# Altium PCB blePGN.PcbDoc
Units mm, origin at the board's own origin, x right, y up, seen from the top; angles counter-clockwise.
Board outline 79.88 x 74.8 mm, 4 copper layers (Top Layer, Internal Plane 1, Internal Plane 2, Bottom Layer), stack 0.462 mm thick; 66 components, 72 nets, 329 pads, 104 vias.
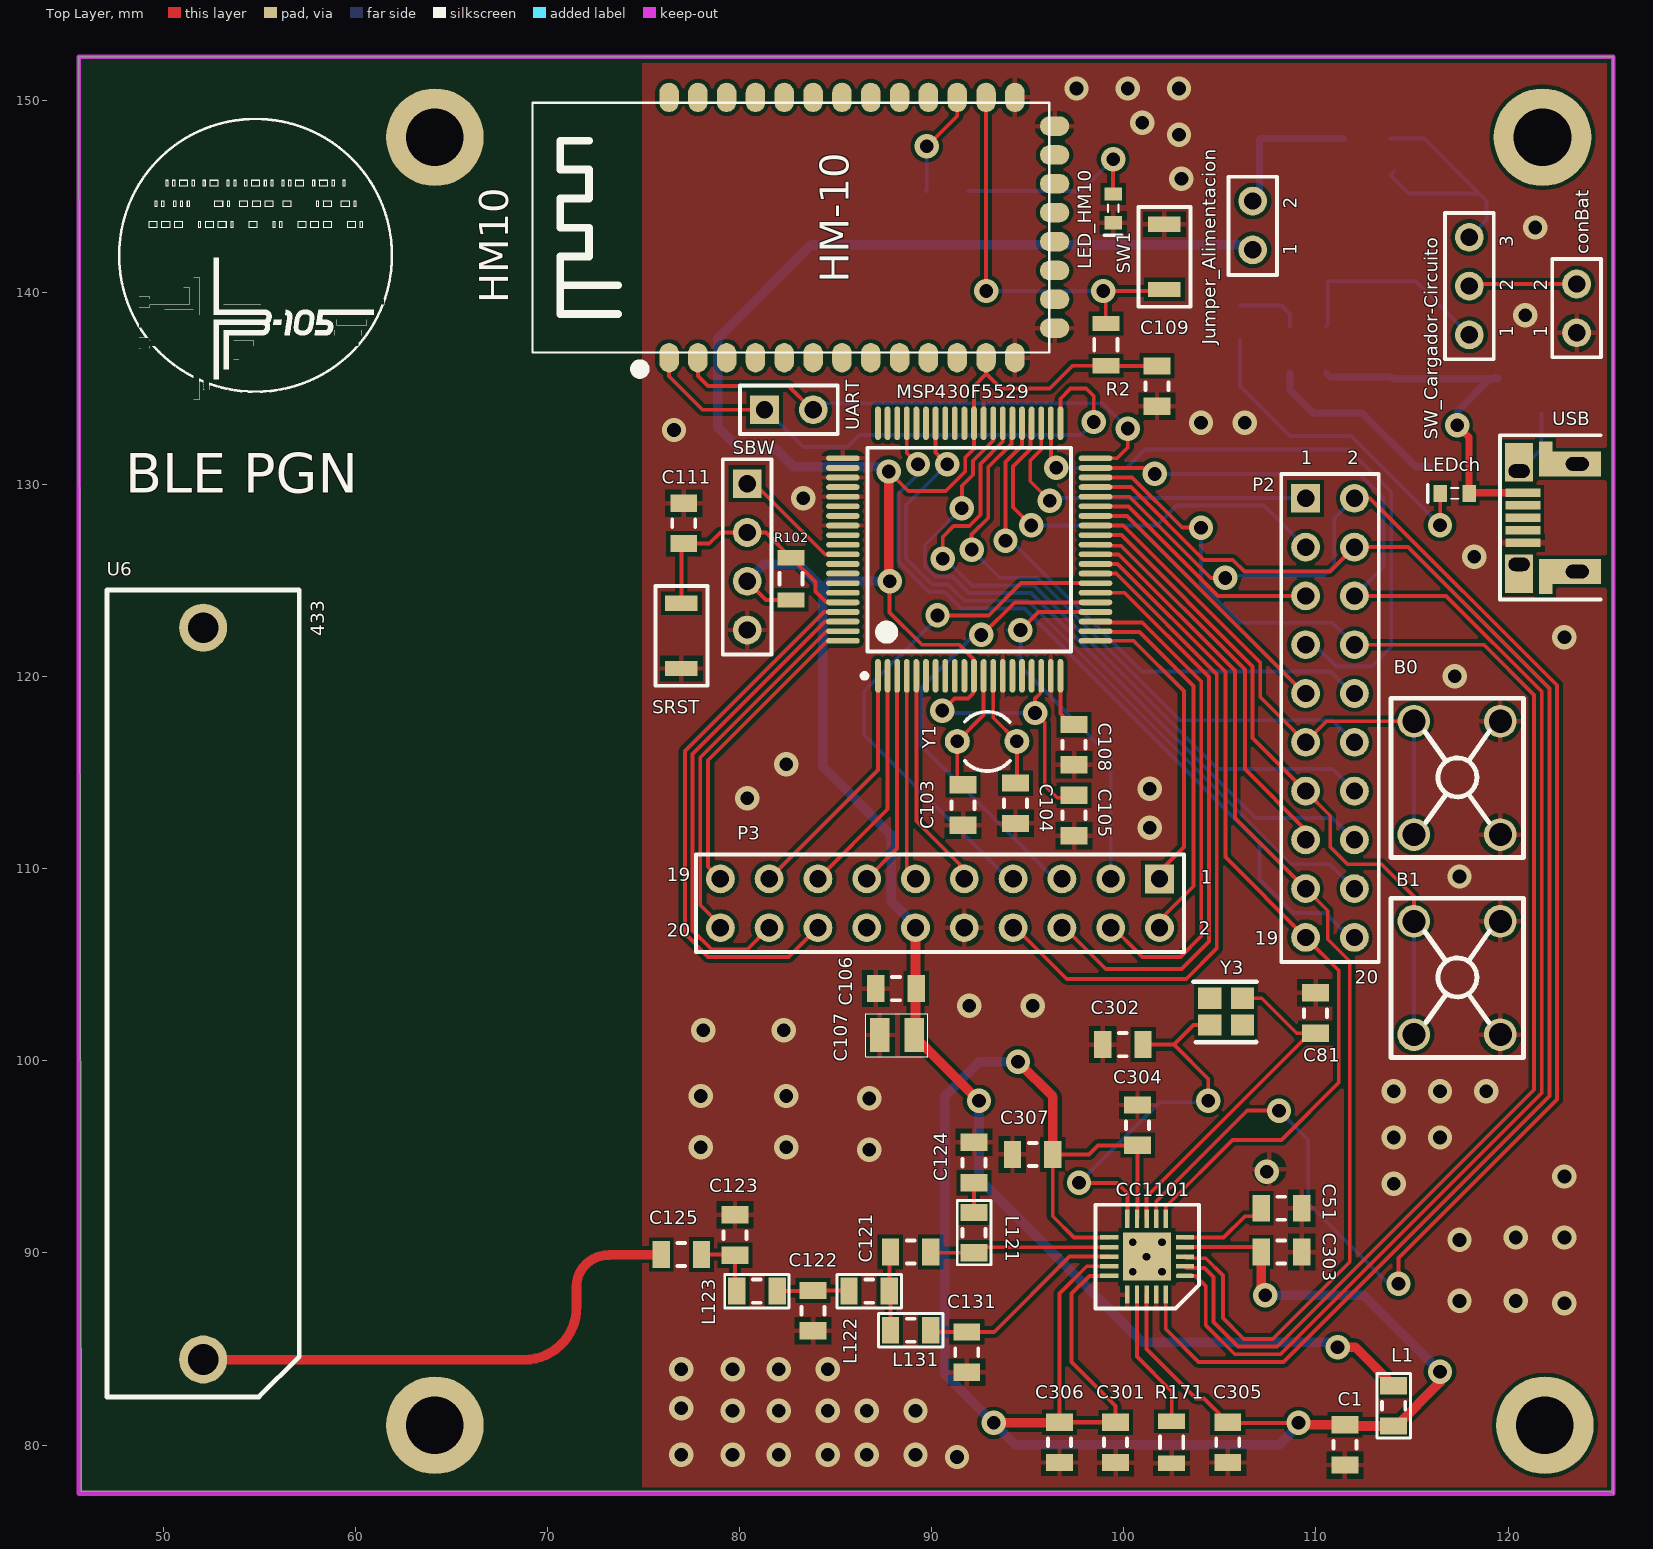
[diagram p0: Top Layer view]
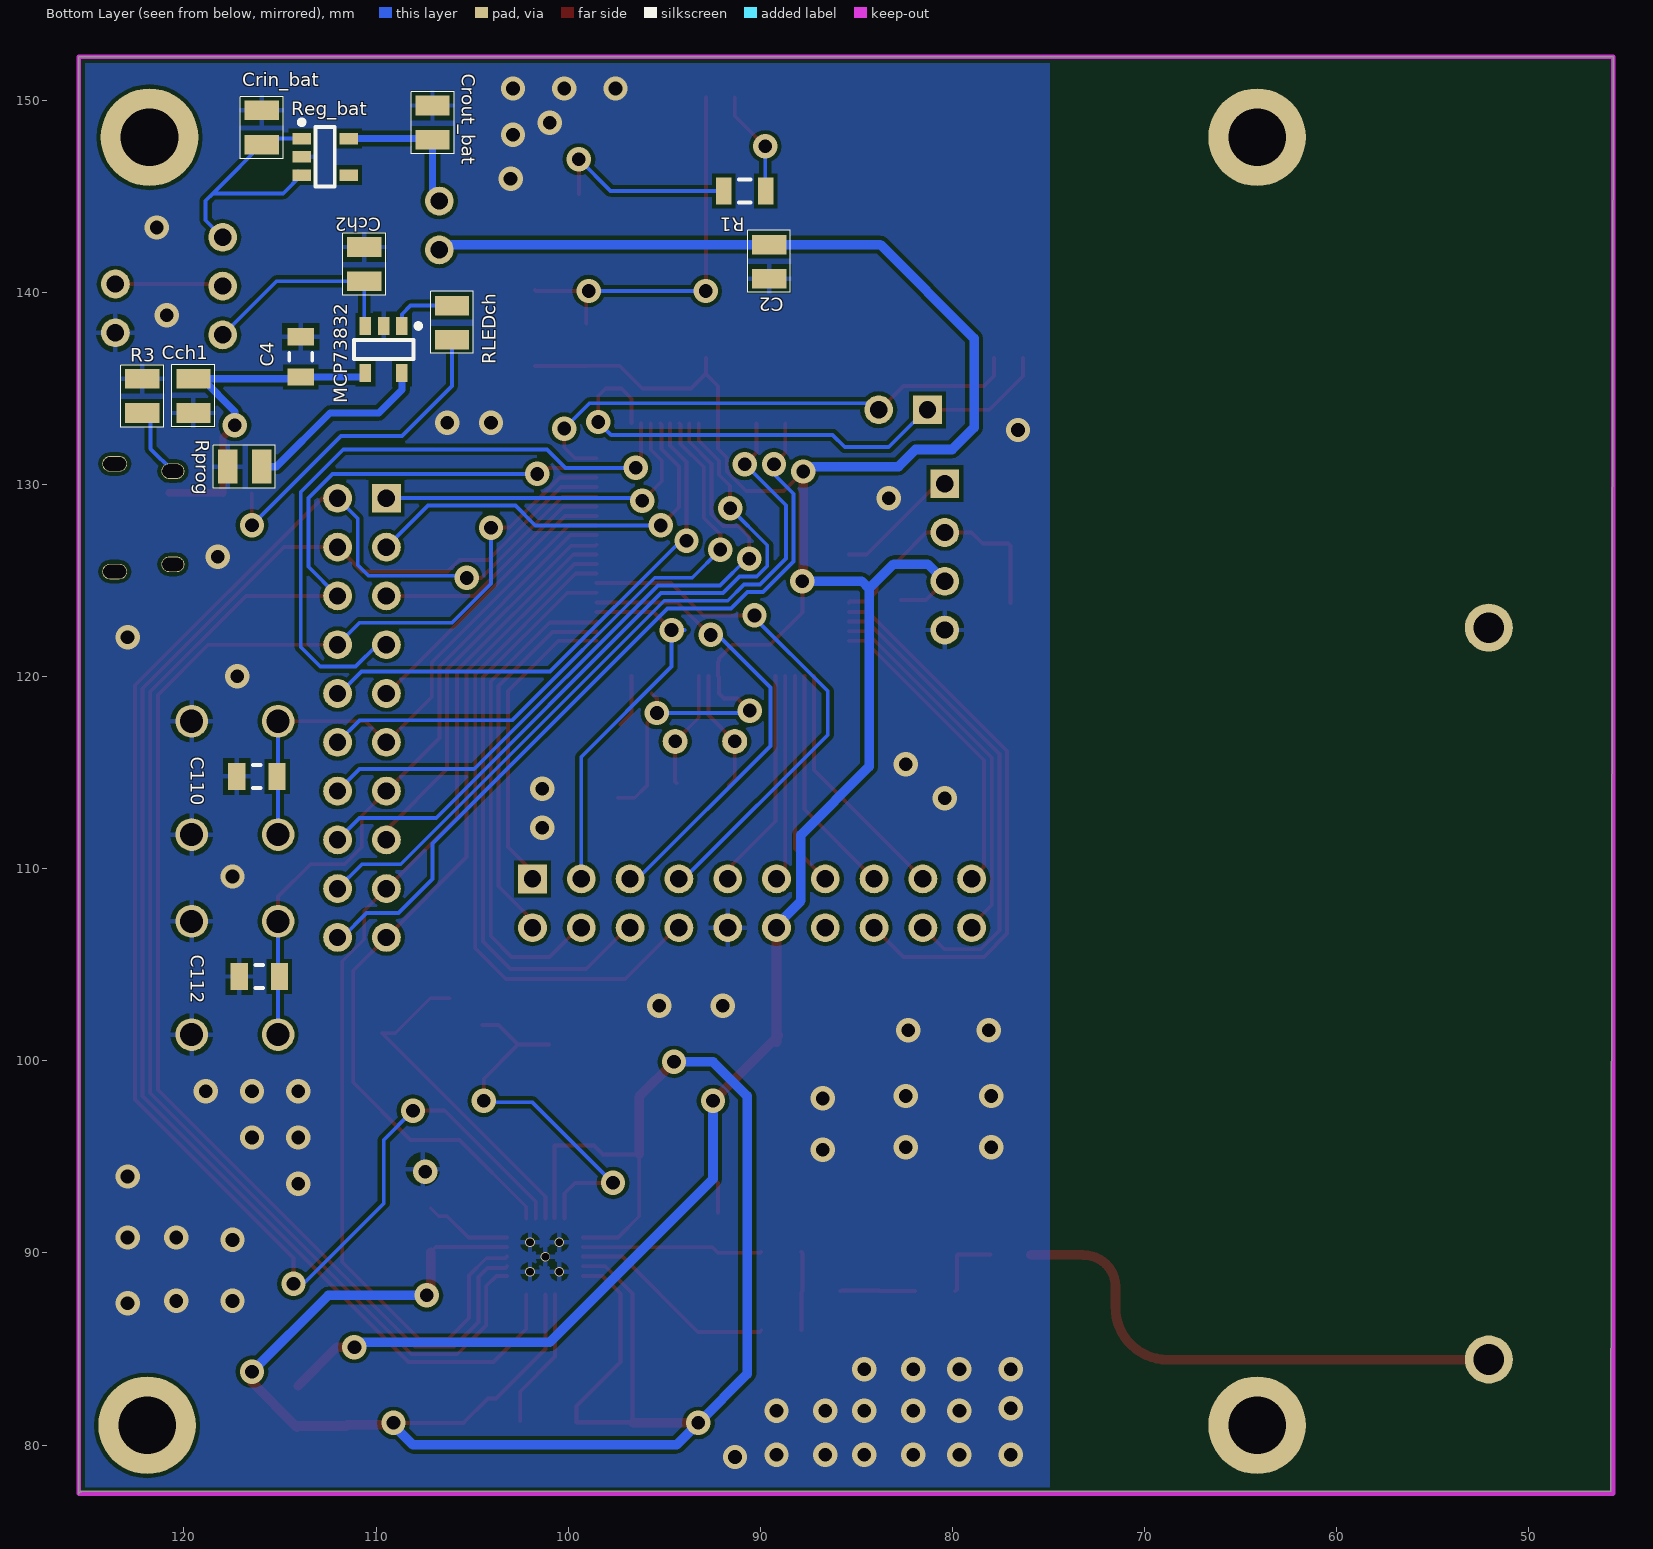
[diagram p1: Bottom Layer view, seen from below]
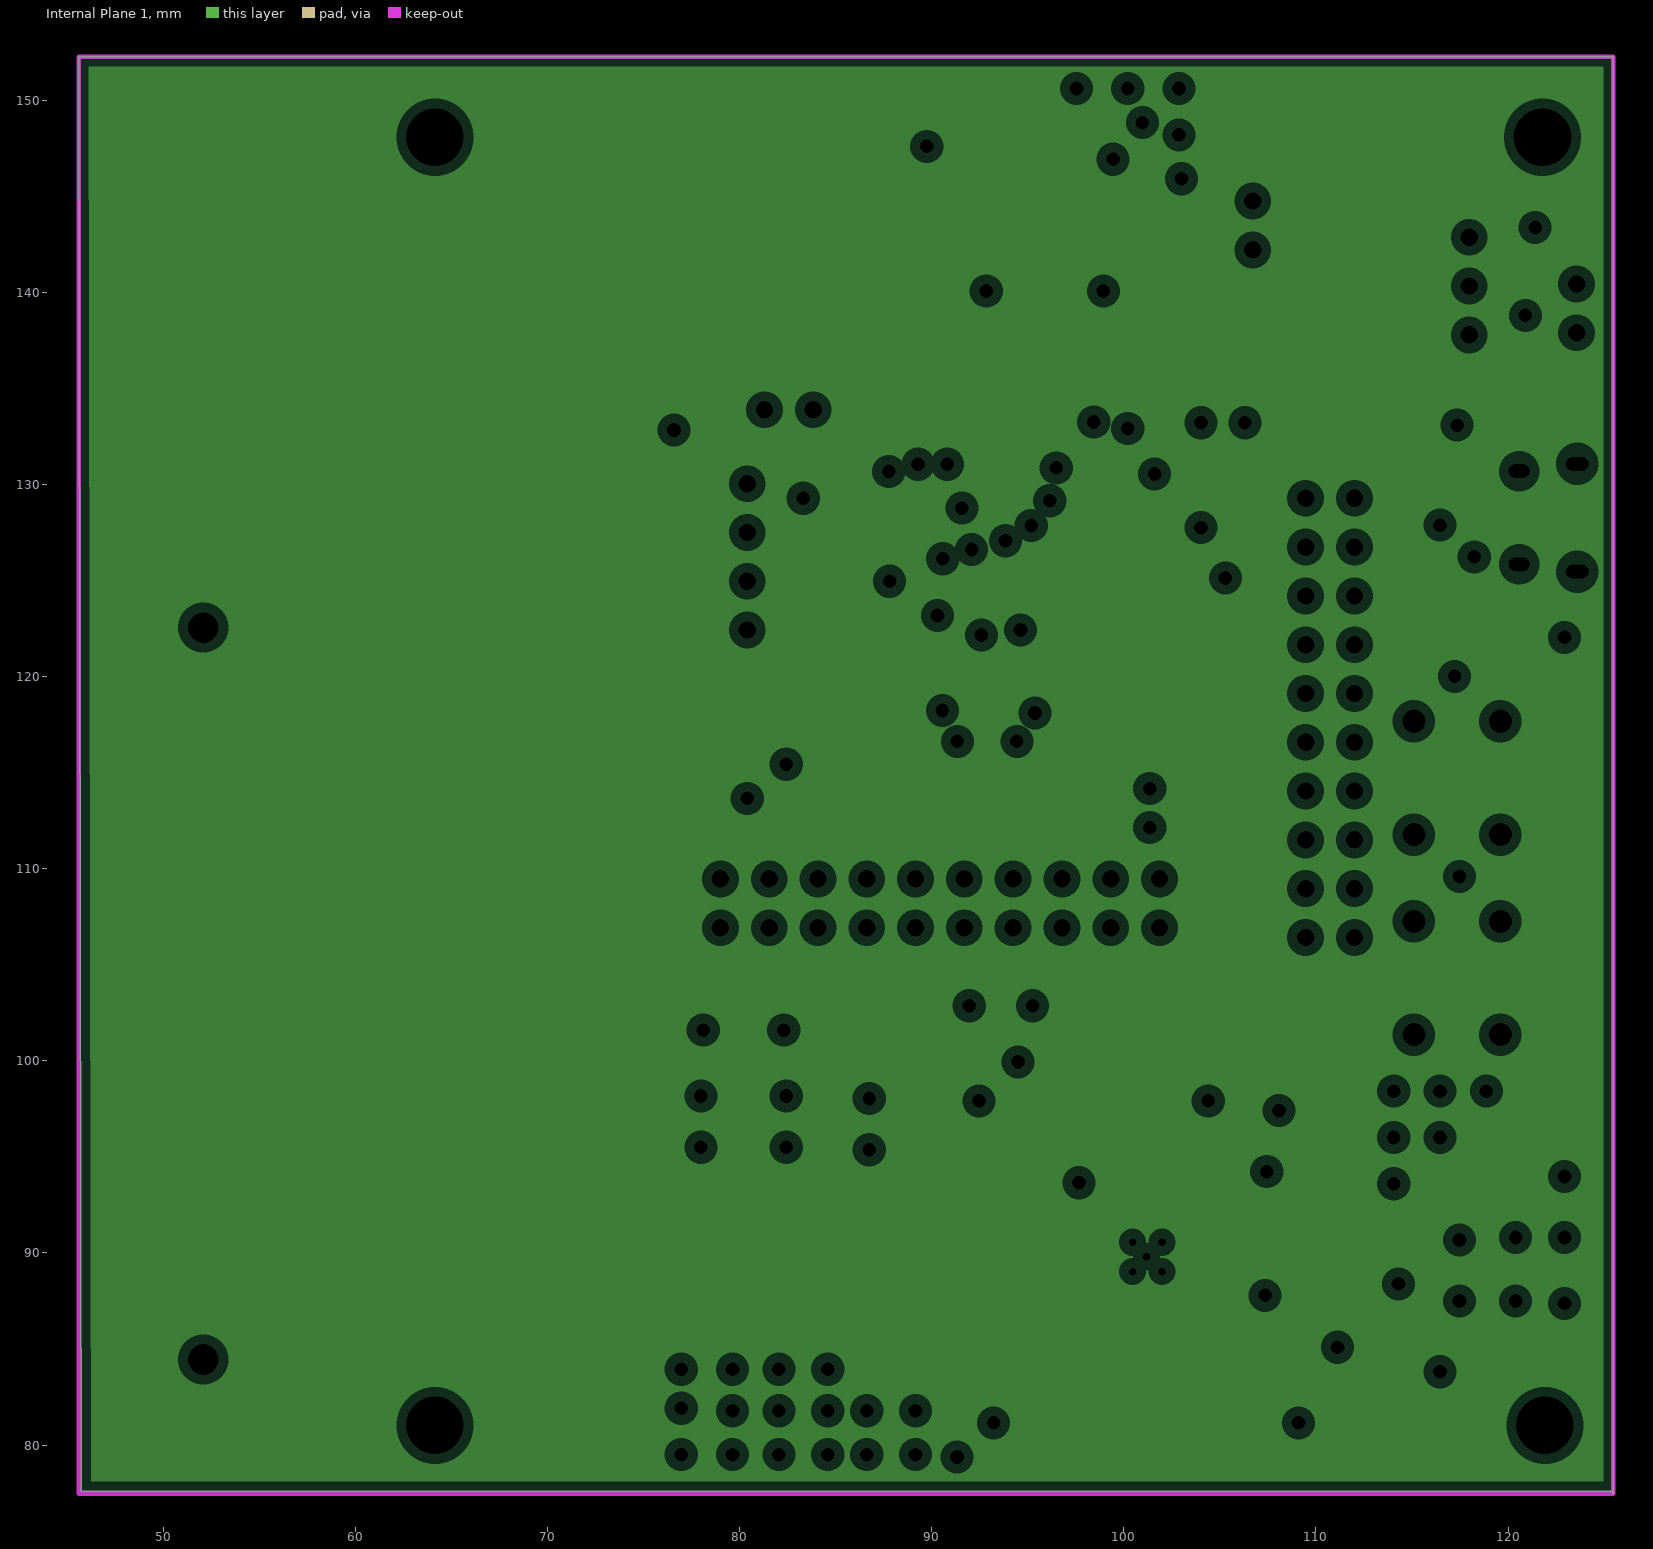
[diagram p2: Internal Plane 1, clearances drawn from the general rule]
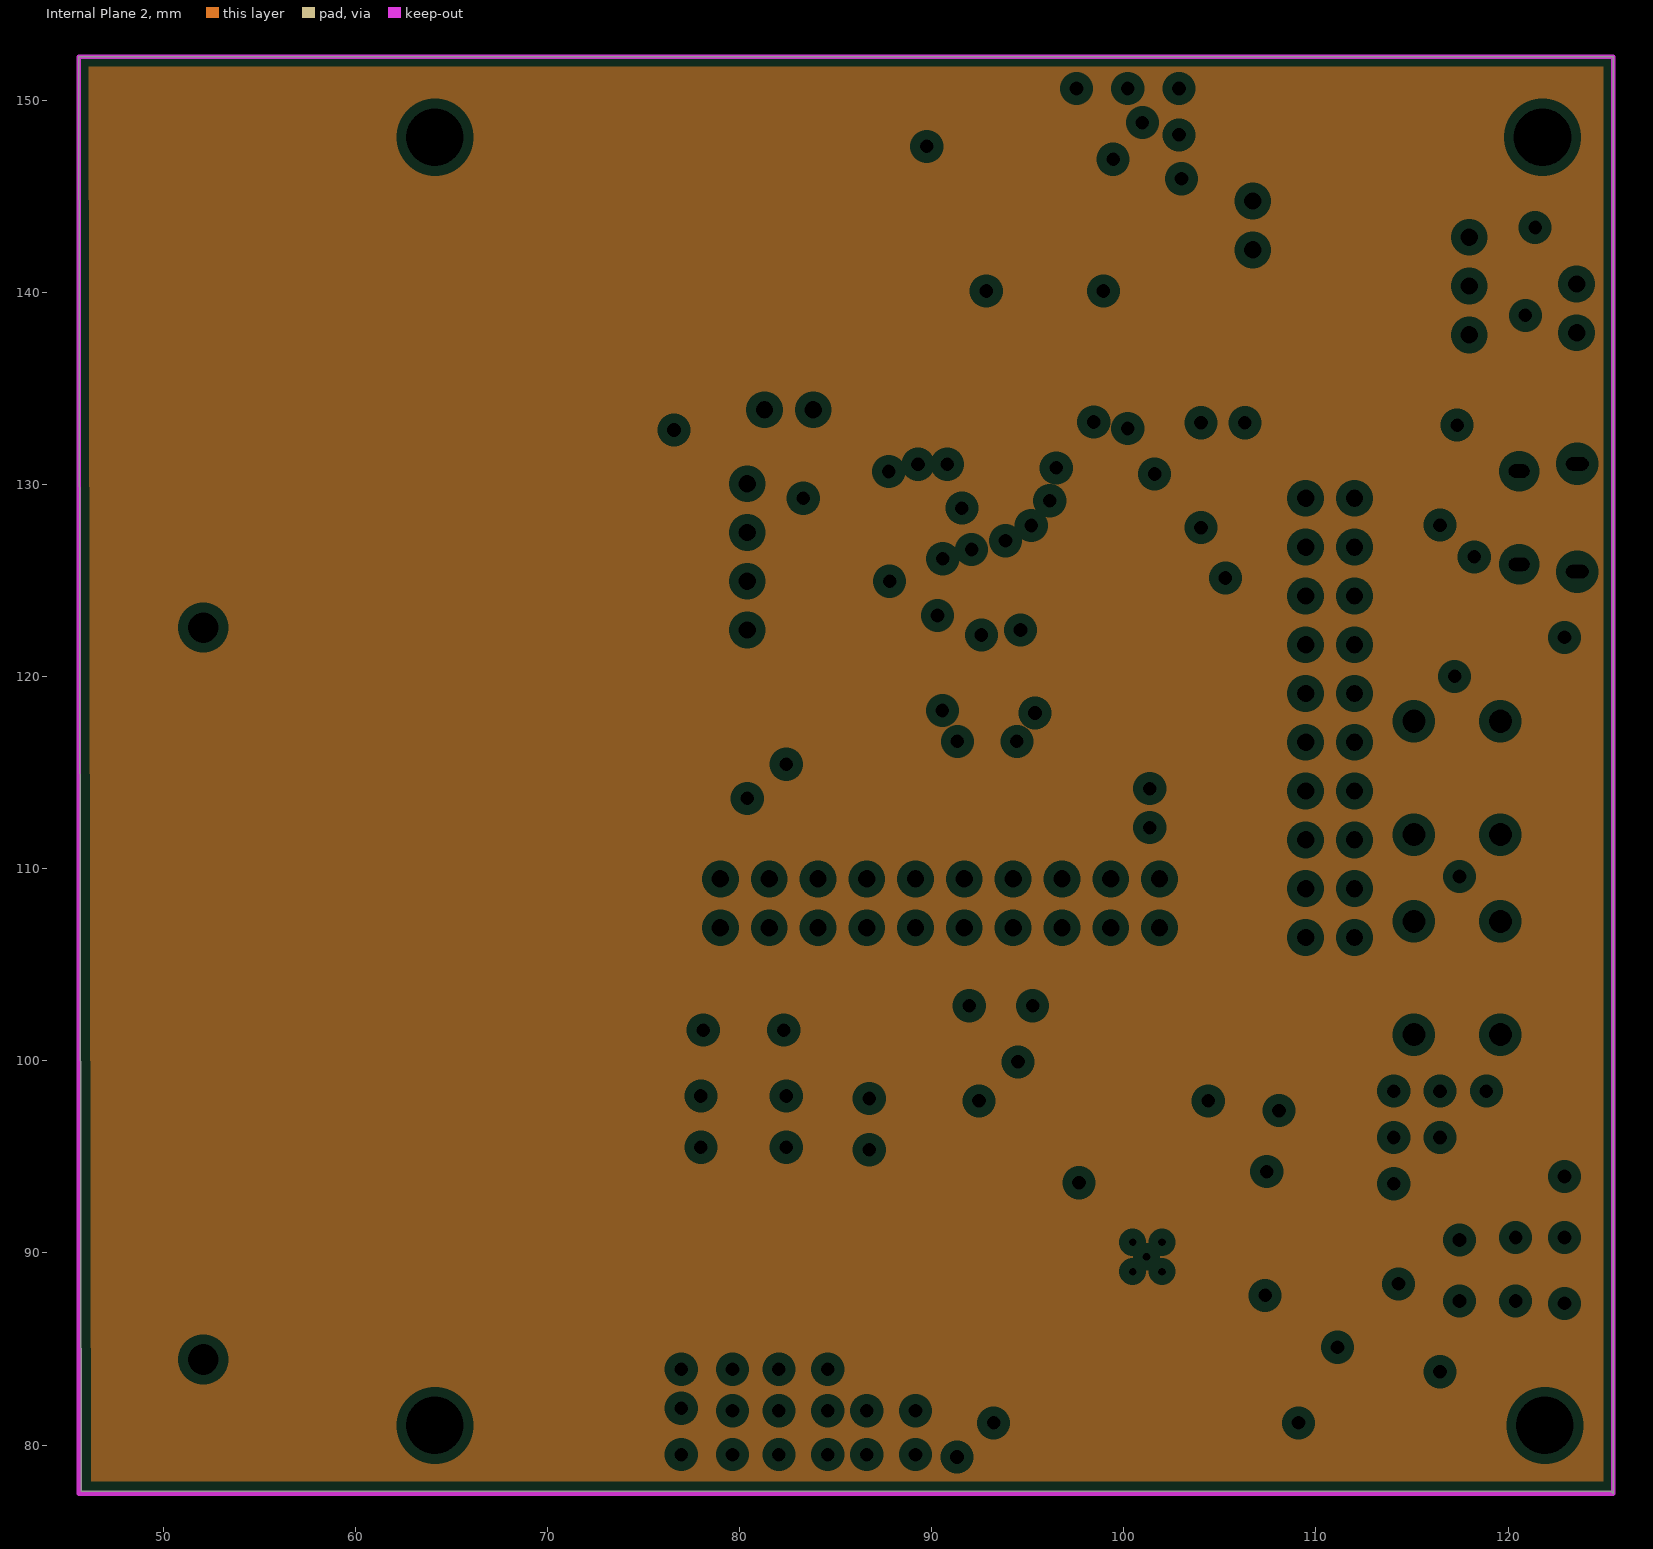
[diagram p3: Internal Plane 2, clearances drawn from the general rule]

## Layer stack, top to bottom
Top Solder: solder mask 0.0102, Solder Resist, Dk 3.5
Top Layer: signal copper 0.0356
Internal Plane 1: plane copper 0.0356
Internal Plane 2: plane copper 0.0356
Dielectric 1: dielectric 0.32, FR-4, Dk 4.8
Bottom Layer: signal copper 0.0356
Bottom Solder: solder mask 0.0102, Solder Resist, Dk 3.5

## Board outline
45.593,152.273 125.476,152.273 125.476,77.47 125.349,77.597 45.72,77.597

## Design rules (kind name [scope] priority, off if disabled: settings)
Clearance [All] p1: gap=0.2
ComponentClearance [All] p1 off: gap=0.254 collisioncheckmode=3 verticalgap=0.254 showdistances=FALSE
Height [All] p1 off: minheight=0 maxheight=25.4 prefheight=12.7
PlaneClearance [All] p1: clearance=0.508
PlaneConnect [All] p1: planeconnectstyle=Relief reliefexpansion=0.508 reliefentries=4 reliefconductorwidth=0.254 reliefairgap=0.254
PolygonConnect [All] p1: connectstyle=Relief reliefconductorwidth=0.254 reliefentries=4 polygonreliefangle="90 Angle" airgapwidth=0.254
RoomDefinition alimentacion [InComponentClass('alimentacion')] p1 off: confinementstyle=ConfineIn formatcopy=TRUE lockcomponents=FALSE outline 125.476,152.019 103.124,152.019 103.124,126.365 125.476,126.365
RoomDefinition headers_botones [InComponentClass('headers_botones')] p2 off: confinementstyle=ConfineIn formatcopy=TRUE lockcomponents=FALSE outline 74.549,101.6 125.222,101.6 125.222,136.017 74.549,136.017
RoomDefinition hm10 [InComponentClass('hm10')] p3 off: confinementstyle=ConfineIn formatcopy=TRUE lockcomponents=FALSE outline 67.31,134.493 106.045,134.493 106.045,152.273 67.31,152.273
RoomDefinition microcontrolador [InComponentClass('microcontrolador')] p4 off: confinementstyle=ConfineIn formatcopy=TRUE lockcomponents=FALSE outline 74.676,110.871 107.823,110.871 107.823,135.255 74.676,135.255
RoomDefinition moduloTransceptorRF [InComponentClass('moduloTransceptorRF')] p5 off: confinementstyle=ConfineIn formatcopy=TRUE lockcomponents=FALSE outline 45.847,77.47 125.476,77.47 125.476,125.349 45.847,125.349
RoutingVias [All] p1: holewidth=0.6 width=1 viastyle="Through Hole" minholewidth=0.711 minwidth=1.27 maxholewidth=0.711 maxwidth=1.27
SolderMaskExpansion [All] p1: expansion=0.102
UnpouredPolygon [All] p1: allowunpoured=FALSE
Width [All] p1: maxlimit=0.5 minlimit=0.2 preferedwidth=0.254
25 further rules are at their usual default settings.

## Classes and differential pairs
component class alimentacion: C4 Cch1 Cch2 conBat Crin_bat Crout_bat Jumper_Alimentacion LEDch MCP73832 R3 Reg_bat RLEDch Rprog SW_Cargador-Circuito USB
component class headers_botones: B0 B1 C110 C112 P2 P3 SBW UART
component class hm10: C2 HM10 LED_HM10 R1 R2 SW1
component class microcontrolador: C103 C104 C105 C106 C107 C108 C109 C111 MSP430F5529 R102 SRST Y1
component class moduloTransceptorRF: C1 C51 C81 C121 C122 C123 C124 C125 C131 C301 C302 C303 C304 C305 C306 C307 CC1101 L1 L121 L122 L123 L131 R171 U6 Y3

## Components (designator, comment, footprint, x,y, rotation, side; value= is the part's Value field where it differs from the comment)
B0 "Pulsador" PushButton 117.348,114.681 r270 top
B1 "Pulsador" pushbutton 117.348,104.267 r270 top
C1 "C" "0805 CAP" 111.506,80.01 r90 top
C2 "Cap" 0805 89.535,141.605 r90 bottom
C4 "C" "0805 CAP" 113.919,136.652 r270 bottom
C51 "C" "0805 CAP" 108.204,92.329 r180 top
C81 "C" "0805 CAP" 109.982,102.489 r270 top
C103 "C" "0805 CAP" 91.632,113.319 r90 top
C104 "C" "0805 CAP" 94.361,113.411 r90 top
C105 "C" "0805 CAP" 97.409,112.776 r270 top
C106 "C" "0805 CAP" 88.138,103.759 r180 top
C107 "C Pol" 0805 88.191,101.346 r180 top
C108 "C" "0805 CAP" 97.409,116.459 r90 top
C109 "C" "0805 CAP" 101.727,135.128 r90 top
C110 "C" "0805 CAP" 116.205,114.808 r180 bottom
C111 "C" "0805 CAP" 77.089,127.982 r270 top
C112 "C" "0805 CAP" 116.078,104.394 r180 bottom
C121 "C" "0805 CAP" 88.9,90.043 r180 top
C122 "C" "0805 CAP" 83.82,86.995 r90 top
C123 "C" "0805 CAP" 79.756,90.932 r270 top
C124 "C" "0805 CAP" 92.202,94.707 r270 top
C125 "C" "0805 CAP" 76.962,89.916 r180 top
C131 "C" "0805 CAP" 91.821,84.836 r270 top
C301 "C" "0805 CAP" 99.568,80.137 r270 top
C302 "C" "0805 CAP" 99.949,100.844 r0 top
C303 "C" "0805 CAP" 108.204,90.043 r180 top
C304 "C" "0805 CAP" 100.711,96.653 r270 top
C305 "C" "0805 CAP" 105.41,80.143 r90 top
C306 "C" "0805 CAP" 96.647,80.143 r90 top
C307 "C" "0805 CAP" 95.25,95.129 r0 top
CC1101 "CC1101 Transceiver" CC1101 103.207,87.807 r180 top
Cch1 "C" 0805 119.507,134.62 r90 bottom
Cch2 "C" 0805 110.617,141.478 r270 bottom
conBat "Header-1x2" HEADER-1x2 123.571,139.192 r90 top
Crin_bat "C" 0805 115.951,148.59 r270 bottom
Crout_bat "C" 0805 107.061,148.844 r270 bottom
HM10 "HM-10 Module" "HM-10 module" 86.36,143.383 r90 top
Jumper_Alimentacion "Header-1x2" HEADER-1x2 106.709,143.471 r270 top
L1 "L" "0805 Ind" 114.046,82.042 r90 top
L121 "L" "0805 Ind" 92.202,91.059 r270 top
L122 "L" "0805 Ind" 86.741,88.011 r0 top
L123 "L" "0805 Ind" 80.899,88.011 r0 top
L131 "L" "0805 Ind" 88.9,85.979 r180 top
LED_HM10 "LED" "0603 LED-RED" 99.441,144.38 r270 top
LEDch "LED" "0603 LED-RED" 117.221,129.54 r180 top
MCP73832 "Linear charge controller" SOT-23-5 109.601,137.033 r270 bottom
MSP430F5529 "MSP430F5529IPNR" TI-PN80_N 91.948,126.619 r90 top
P2 "MHDR2X10" HDR2X10 109.462,129.286 r270 top
P3 "MHDR2X10" HDR2X10 101.854,109.474 r180 top
R1 "R" "0805 RES" 90.805,145.288 r180 bottom
R2 "R" "0805 RES" 99.06,137.287 r270 top
R3 "Ferrite bead" 0805 122.174,134.62 r270 bottom
R102 "R" "0805 RES" 82.677,125.095 r270 top
R171 "R" "0805 RES" 102.489,80.143 r90 top
Reg_bat "LP5951 MF3.3" SOT-23-5 112.649,147.066 r180 bottom
RLEDch "Res1" 0805 106.045,138.43 r90 bottom
Rprog "Res1" 0805 116.84,130.937 r0 bottom
SBW "MHDR1X4" HDR1X4 80.391,130.048 r270 top
SRST "Pulsador" B3U-1000P 76.962,122.125 r90 top
SW1 "Pulsador" B3U-1000P 102.108,141.859 r90 top
SW_Cargador-Circuito "Header-1x3" Header-1x3-Jumper 117.983,140.335 r90 top
U6 "Antena PCB" ANT-433-HETH 52.07,103.505 r90 top
UART "MHDR1X2" HDR1X2 82.55,133.858 r0 top
USB "USB" USB-MicroB 120.777,128.27 r90 top (schematic designator USB_RECEP)
Y1 "XTAL_CFPX-157_32.768K_SMD" R38 92.879,116.63 r90 top
Y3 "XTAL_EPSON_26MHZ" XTAL_EPSON_26MHZ 106.172,101.86 r180 top

## Footprints (in the part's own frame and the unit in brackets; to place one, negate y for a bottom-side part, rotate by r counter-clockwise, add the part's x,y. Pads: shape width x height; smd on the part's side, far side on the other; paste and mask are expansions set on the pad)
"0603 LED-RED" [mm] "LED, Body 1.6x0.8mm, IPC High Density"
  rect 0.7x0.9 smd: 1(-0.75,0) 2(0.75,0)
  silkscreen extent -0.2,-0.45 1.4,0.45, body extent -0.85,-0.45 0.85,0.45, height 0.9
0805 [mm]
  rect 1.02x1.78 smd: 1(-0.89,0) 2(0.89,0)
  silkscreen extent -1.6,-1.11 1.63,1.12
"0805 CAP" [mm] "Chip Capacitor, 2-Leads, Body 2,00x1,25mm, IPC Medium Density"
  rect 0.9x1.4 smd: 1(-1.05,0) 2(1.05,0)
  silkscreen extent -0.2,-0.6 0.2,0.6, body extent -1,-0.6 1,0.6, height 1.2
"0805 Ind" [mm] "Chip Capacitor, 2-Leads, Body 2,00x1,25mm, IPC Medium Density"
  rect 0.9x1.4 smd: 1(-1.05,0) 2(1.05,0)
  silkscreen extent -1.67,-0.87 1.67,0.88, body extent -1,-0.6 1,0.6, height 0.95
"0805 RES" [mm] "Chip Capacitor, 2-Leads, Body 2,0x1,3mm, IPC Medium Density"
  rect 0.8x1.4 smd: 1(-1.1,0) 2(1.1,0)
  silkscreen extent -0.3,-0.6 0.3,0.6, body extent -1,-0.63 1,0.62, height 0.44
ANT-433-HETH [mm] "Antena Helice 433"
  round 2.5 hole 1.6: 0(-19.05,0) ""(19.05,0)
  silkscreen extent -21,-5 21,5
B3U-1000P [mm]
  rect 0.8x1.7 smd: 1(-1.7,0) 2(1.7,0)
  silkscreen extent -2.6,-1.36 2.6,1.35, body extent -2,-1.25 2,1.25, height 1.6
CC1101 [mm]
  rect 2.5x2.5 smd: 0(2,-2)
  oval 0.95x0.23 smd: 1(0.03,-1)
  rect 0.95x0.23 smd: 2(0.03,-1.5) 3(0.03,-2) 4(0.03,-2.5) 5(0.03,-3) 11(3.97,-3) 12(3.97,-2.5) 13(3.97,-2) 14(3.97,-1.5) 15(3.97,-1)
  rect 0.23x0.95 smd: 6(1.025,-3.975) 7(1.525,-3.975) 8(2.025,-3.975) 9(2.525,-3.975) 10(3.025,-3.975) 16(3.025,-0.025) 17(2.525,-0.025) 18(2.025,-0.025) 19(1.525,-0.025) 20(1.025,-0.025)
  silkscreen extent -0.71,-4.7 4.69,0.7
HDR1X2 [mm]
  rect 1.5x1.5 hole 0.9: 1(-1.257,0.039)
  round 1.5 hole 0.9: 2(1.283,0.039)
  silkscreen extent -2.53,-1.23 2.55,1.31
HDR1X4 [mm] "Connector; Header; 4 Position"
  rect 1.5x1.5 hole 0.9: 1(0,0)
  round 1.5 hole 0.9: 2(2.54,0) 3(5.08,0) 4(7.62,0)
  silkscreen extent -1.27,-1.27 8.89,1.27
HDR2X10 [mm] "Connector; Header; 10x2 Position"
  rect 1.5x1.5 hole 0.9: 1(0,0)
  round 1.5 hole 0.9: 2(0,2.54) 3(2.54,0) 4(2.54,2.54) 5(5.08,0) 6(5.08,2.54) 7(7.62,0) 8(7.62,2.54) 9(10.16,0) 10(10.16,2.54) 11(12.7,0) 12(12.7,2.54) 13(15.24,0) 14(15.24,2.54) 15(17.78,0) 16(17.78,2.54) 17(20.32,0) 18(20.32,2.54) 19(22.86,0) 20(22.86,2.54)
  silkscreen extent -1.27,-1.27 24.13,3.81
HEADER-1x2 [mm]
  round 1.5 hole 0.9: 1(-1.29,0) 2(1.25,0)
  silkscreen extent -2.56,-1.27 2.55,1.27, body extent -2.57,-1.24 2.52,1.25, height 8.54
Header-1x3-Jumper [mm]
  round 1.5 hole 0.9: 1(-2.54,0) 2(0,0) 3(2.54,0)
  silkscreen extent -3.81,-1.27 3.81,1.27, body extent -3.81,-1.22 3.81,1.27, height 8.54
"HM-10 module" [mil]
  rrect99% 60x40 smd: 1(-266.77,395.08) 2(-266.77,336.08) 3(-266.77,277.08) 4(-266.77,218.08) 5(-266.77,159.08) 6(-266.77,99.8) 7(-266.77,40.75) 8(-266.77,-18.31) 9(-266.77,-77.36) 10(-266.77,-136.42) 11(-266.77,-195.47) 12(-266.77,-254.53) 13(-266.77,-313.58) 22(266.77,-313.58) 23(266.77,-254.53) 24(266.77,-195.47) 25(266.77,-136.42) 26(266.77,-77.36) 27(266.77,-18.31) 28(266.77,40.75) 29(266.77,99.8) 30(266.77,159.08) 31(266.77,218.08) 32(266.77,277.08) 33(266.77,336.08) 34(266.77,395.08)
  rrect99% 40x60 smd: 14(-206.14,-395.08) 15(-147.08,-395.08) 16(-88.03,-395.08) 17(-28.97,-395.08) 18(30.77,-395.08) 19(89.77,-395.08) 20(148.77,-395.08) 21(207.77,-395.08)
  silkscreen extent -300,-384 256,675, body extent -256,-384 256,675, height 63
PushButton [mm]
  round 1.7 hole 1.2: 1(-3,2.25) 1(2.9,2.25) 2(-3,-2.25) 2(2.9,-2.25)
  silkscreen extent -4.2,-3.45 4.1,3.45, body extent -3.96,-3.1 3.96,3.1, height 4
pushbutton [mm]
  round 1.7 hole 1.2: 1(-3,2.25) 1(2.9,2.25) 2(-3,-2.25) 2(2.9,-2.25)
  silkscreen extent -4.2,-3.45 4.1,3.45, body extent -3.96,-3.1 3.96,3.1, height 4
R38 [mm] "Crystal, Thru-Hole; 2 Leads; Body 3.1 x 8.2 mm (Dia.xH)"
  round 1.3 hole 0.7: 1(0,1.55) 2(0,-1.55)
  silkscreen extent -1.55,-1.19 1.55,1.17
SOT-23-5 [mm] "SOT23, 5-Leads, Body 2,93x2,80mm, Pitch 0,95mm, IPC Medium Density"
  rect 0.95x0.6 smd: 1(-1.225,0.95) 2(-1.225,0) 3(-1.225,-0.95) 4(1.225,-0.95) 5(1.225,0.95)
  silkscreen extent -1.35,-1.55 0.5,1.92, body extent -1.5,-1.5 1.5,1.5, height 1.4
TI-PN80_N [mm] "QFP, 80-Leads, Body 12x12mm, Pitch 0.5mm, IPC Medium Density"
  oval 1.75x0.3 smd: 1(-6.575,4.75) 2(-6.575,4.25) 3(-6.575,3.75) 4(-6.575,3.25) 5(-6.575,2.75) 6(-6.575,2.25) 7(-6.575,1.75) 8(-6.575,1.25) 9(-6.575,0.75) 10(-6.575,0.25) 11(-6.575,-0.25) 12(-6.575,-0.75) 13(-6.575,-1.25) 14(-6.575,-1.75) 15(-6.575,-2.25) 16(-6.575,-2.75) 17(-6.575,-3.25) 18(-6.575,-3.75) 19(-6.575,-4.25) 20(-6.575,-4.75) 41(6.575,-4.75) 42(6.575,-4.25) 43(6.575,-3.75) 44(6.575,-3.25) 45(6.575,-2.75) 46(6.575,-2.25) 47(6.575,-1.75) 48(6.575,-1.25) 49(6.575,-0.75) 50(6.575,-0.25) 51(6.575,0.25) 52(6.575,0.75) 53(6.575,1.25) 54(6.575,1.75) 55(6.575,2.25) 56(6.575,2.75) 57(6.575,3.25) 58(6.575,3.75) 59(6.575,4.25) 60(6.575,4.75)
  oval 0.3x1.75 smd: 21(-4.75,-6.575) 22(-4.25,-6.575) 23(-3.75,-6.575) 24(-3.25,-6.575) 25(-2.75,-6.575) 26(-2.25,-6.575) 27(-1.75,-6.575) 28(-1.25,-6.575) 29(-0.75,-6.575) 30(-0.25,-6.575) 31(0.25,-6.575) 32(0.75,-6.575) 33(1.25,-6.575) 34(1.75,-6.575) 35(2.25,-6.575) 36(2.75,-6.575) 37(3.25,-6.575) 38(3.75,-6.575) 39(4.25,-6.575) 40(4.75,-6.575) 61(4.75,6.575) 62(4.25,6.575) 63(3.75,6.575) 64(3.25,6.575) 65(2.75,6.575) 66(2.25,6.575) 67(1.75,6.575) 68(1.25,6.575) 69(0.75,6.575) 70(0.25,6.575) 71(-0.25,6.575) 72(-0.75,6.575) 73(-1.25,6.575) 74(-1.75,6.575) 75(-2.25,6.575) 76(-2.75,6.575) 77(-3.25,6.575) 78(-3.75,6.575) 79(-4.25,6.575) 80(-4.75,6.575)
  silkscreen extent -6.7,-5.3 5.3,5.57, body extent -6,-6 6,6, height 1.6
USB-MicroB [mm]
  rect 0.45x1.8 smd: 1(-1.3,0) 2(-0.65,0) 3(0,0) 4(0.65,0) 5(1.3,0)
  rect 0.55x0.7 smd: 6(-3.7,-1.175) 6(3.7,-1.175)
  rect 2x1.45 smd: 6(-2.9,0.2) 6(2.9,0.2)
  oval 0.8x1.3 hole 0.7 slot 1.2 at 90 deg: 6(-2.8,-2.83) 6(2.81,-2.83)
  rect 1.3x3.25 smd: 6(-2.8,-2.45) 6(2.8,-2.45)
  oval 0.8x1.2 hole 0.7 slot 1.1 at 90 deg: 6(-2.42,0.2) 6(2.43,0.2)
  silkscreen extent -4.25,-4.05 4.3,1.2, body extent -4.1,-4.95 4.1,0.48, height 2.68
XTAL_EPSON_26MHZ [mm]
  rect 1.2x1.1 smd: 1(0,-1.4) 2(1.7,-1.4) 3(1.7,0) 4(0,0)
  silkscreen extent -0.74,-2.26 2.55,0.89

## Part data
B0 B1 SRST SW1: library part Pulsador_1, "Switch"
C1 C2 C4 C51 C81 C103 C104 C105 C106 C108 C109 C110 C111 C112 C121 C122 C123 C124 C125 C131 C301 C302 C303 C304 C305 C306 C307 Cch1 Cch2 Crin_bat Crout_bat: "Capacitor"
C107: "Polarized Capacitor (Surface Mount)"
L1 L121 L122 L123 L131: "Inductor"
MCP73832: library part MCP73832, "Linear charge controller SOT 235"
MSP430F5529: library part F552X---PN80, "***MSP430F552X***PN80  / http://www.ti.com/lit/gpn/msp430f5529  / Rev1.0 06/2010    For F552X where X is 1,5,7,9"
P2 P3: "Header, 10-Pin, Dual row"
R1 R2 R102 R171 RLEDch Rprog: "Resistor"
R3: library part R, "Resistor"
Reg_bat: library part LP5951, "TI Lineal Regulator SOT 235"
SBW: "Header, 4-Pin"
UART: "Header, 2-Pin"
USB: library part USB_MICRO_FLIPPED
Y1: "Crystal Oscillator"
Y3: "Pin 2 and 4 to ground"

## Free pads (board coordinates)
  round 5.08 hole 2.997: 9(64.135,148.082) 11(64.135,81.026) 13(121.92,81.026)
  round 5.088 hole 2.997: 12(121.793,148.082)

## Via types
v1: diameter 1.27, hole 0.711, Top Layer to Bottom Layer, 99 vias
v2: diameter 0.5, hole 0.4, Top Layer to Bottom Layer, 5 vias

## Nets (pads, with @x,y where several pads share a name; then routed paths per layer and width w, separated by ;. In a path a pad name is that pad's centre, name@x,y a point inside that pad or via, vN(x,y) a via of type N, cw(c..) or ccw(c..) an arc to the next point about the centre after c; other vN are vias at no path point)
ANT: C125.2 U6.0 | length 27.5
  Top Layer w0.254: 71.505,87.229 71.541,87.193 ; 73.158,89.889 cw(c73.158,88.236) 73.182,89.889
  Top Layer w0.5: U6.0@52.07,84.438 68.798,84.438 ccw(c68.775,87.168) 71.505,87.229 71.505,88.236 ; 71.505,88.259 cw(c73.158,88.236) 73.158,89.889 ; 73.182,89.889 73.209,89.916 C125.2
BSL_RX: MSP430F5529.23 P3.4 | length 26.1
  Top Layer w0.2: MSP430F5529.23 98.573,122.819 100.955,122.819 104.032,119.742 104.032,106.497 102.945,105.41 100.965,105.41 P3.4@99.187,107.188
BSL_TX: MSP430F5529.22 P3.2 | length 19.4
  Top Layer w0.2: MSP430F5529.22 98.573,122.319 100.82,122.319 103.632,119.507 103.632,109.093 P3.2@101.727,107.188
CSN: CC1101.7 MSP430F5529.36 P2.2 | length 88.9
  Top Layer w0.2: MSP430F5529.36 100.299,129.369 104.526,125.142 v1(105.283,125.142) ; CC1101.7 101.682,92.665 106.426,97.409 v1(108.077,97.409) ; P2.2 112.822,129.286 122.555,119.553 122.555,97.998 114.3,89.743 v1(114.3,88.392)
  Bottom Layer w0.2: v1(105.283,125.142) 105.397,125.256 110.397,125.256 110.952,125.811 110.952,128.236 P2.2 ; v1@108.077,97.155 v1(108.077,97.409) 109.601,95.885 109.601,92.583 113.792,88.392 v1(114.3,88.392)
GDO0: CC1101.6 MSP430F5529.29 P2.19 | length 45.2
  Top Layer w0.2: MSP430F5529.29 99.671,125.869 105.283,120.257 105.283,110.605 P2.19 111.188,104.7 111.188,98.87 108.204,95.885 105.664,95.885 102.182,92.403 CC1101.6
GDO2: CC1101.3 MSP430F5529.30 P2.17 | length 56.3
  Top Layer w0.2: MSP430F5529.30 99.737,126.369 105.791,120.315 105.791,112.637 P2.17 110.612,107.817 110.612,106.332 111.76,105.183 111.76,89.535 107.753,85.528 106.242,85.528 105.156,86.614 105.156,88.831 104.265,89.722 103.262,89.722 CC1101.3
GND: B0.1 B1.1 C1.1 C2.1 C4.1 C51.1 C81.1 C103.1 C104.1 C105.2 C106.2 C107.2 C108.1 C109.1 C110.1 C111.1 C112.1 C122.1 C123.1 C124.1 C131.2 C301.2 C302.1 C303.1 C304.1 C305.1 C306.1 C307.1 CC1101.0 CC1101.16 CC1101.19 Cch1.1 Cch2.1 conBat.1 Crin_bat.1 Crout_bat.1 HM10.13 HM10.14 HM10.21 HM10.22 LED_HM10.2 MCP73832.2 MSP430F5529.14 MSP430F5529.19 MSP430F5529.49 MSP430F5529.61 MSP430F5529.63 MSP430F5529.65 MSP430F5529.68 P3.10 R3.1 R171.1 Reg_bat.2 Rprog.2 SBW.4 SRST.1 SW1.2 USB.1
  other v1: 91.313,79.375 76.962,79.502 79.629,79.502 82.042,79.502 84.582,79.502 86.614,79.502 89.154,79.502 79.629,81.788 82.042,81.788 84.582,81.788 86.614,81.788 89.154,81.788 76.962,81.915 76.962,83.947 79.629,83.947 82.042,83.947 84.582,83.947 122.936,87.376 117.475,87.503 120.396,87.503 117.475,90.678 120.396,90.805 122.936,90.805 114.046,93.599 122.936,93.98 107.442,94.234 86.741,95.377 77.978,95.504 82.423,95.504 114.046,96.012 116.459,96.012 86.741,98.044 77.978,98.171 82.423,98.171 114.046,98.425 116.459,98.425 118.872,98.425 78.105,101.6 82.296,101.6 91.948,102.87 95.25,102.87 117.475,109.601 101.346,112.141 80.391,113.665 101.346,114.173 82.423,115.443 117.221,120.015 122.936,122.047 118.237,126.238 83.312,129.286 76.581,132.842 104.013,133.223 106.299,133.223 120.904,138.811 121.412,143.383 102.997,145.923 102.87,148.209 100.965,148.844 97.536,150.622 100.203,150.622 102.87,150.622
  other v2: 100.457,89.027 101.987,89.027 101.182,89.807 100.457,90.557 101.987,90.557
MCU_P1.0: MSP430F5529.21 P3.1 | length 15.8
  Top Layer w0.2: MSP430F5529.21 100.508,121.869 103.124,119.253 103.124,111.125 P3.1@101.727,109.728
MCU_P1.3: MSP430F5529.24 P3.3 | length 19.9
  Top Layer w0.2: v1(94.615,122.428) 95.556,123.369 MSP430F5529.24
  Bottom Layer w0.2: 93.928,122.428 v1(94.615,122.428) 94.615,120.523 99.314,115.824 P3.3
MCU_P1.4: MSP430F5529.25 P3.5 | length 24.4
  Top Layer w0.2: v1(92.583,122.174) 92.622,122.174 94.317,123.869 MSP430F5529.25
  Bottom Layer w0.2: v1(92.583,122.174) 92.583,122.555 89.471,119.444 89.471,116.395 96.139,109.728 P3.5@96.647,109.728
MCU_P1.5: MSP430F5529.26 P3.6 | length 30.9
  Top Layer w0.2: P3.6@96.647,107.188 99.06,104.775 102.997,104.775 104.432,106.21 104.432,119.977 100.04,124.369 MSP430F5529.26
MCU_P1.6: MSP430F5529.27 P3.7 | length 27.3
  Top Layer w0.2: v1(90.297,123.19) 92.964,123.19 94.643,124.869 MSP430F5529.27
  Bottom Layer w0.2: v1(90.297,123.19) 90.297,123.063 86.487,119.253 86.487,116.967 93.726,109.728 P3.7@94.107,109.728
MCU_P1.7: MSP430F5529.28 P3.8 | length 35.4
  Top Layer w0.2: P3.8@94.107,107.188 97.028,104.267 103.251,104.267 104.832,105.848 104.832,120.143 99.606,125.369 MSP430F5529.28
MCU_P2.2: MSP430F5529.31 P2.15 | length 20.6
  Top Layer w0.2: MSP430F5529.31 98.573,126.819 99.853,126.819 106.299,120.373 106.299,115.189 109.462,112.026 P2.15
MCU_P2.3: B1.2 C112.2 MSP430F5529.32 P2.13 | length 34.7
  Top Layer w0.2: MSP430F5529.32 99.868,127.369 106.699,120.538 106.699,116.809 P2.13 110.744,112.764 110.744,111.125 111.633,110.236 113.411,110.236 115.098,108.549 B1.2@115.098,107.267
  Bottom Layer w0.2: B1.2@115.028,101.437 B1.2@115.098,101.367 ; B1.2@115.098,101.507 B1.2@115.098,107.267
MCU_P2.4: B0.2 C110.2 MSP430F5529.33 P2.11 | length 28.7
  Top Layer w0.2: MSP430F5529.33 99.969,127.869 107.099,120.739 107.099,118.949 P2.11 110.557,117.681 B0.2@115.098,117.681
  Bottom Layer w0.2: B0.2@115.098,111.781 B0.2@115.098,117.681
MCU_P2.5: MSP430F5529.34 P2.9 | length 14.8
  Top Layer w0.2: MSP430F5529.34 100.168,128.369 109.411,119.126 P2.9
MCU_P2.6: MSP430F5529.35 P2.5 | length 12.9
  Top Layer w0.2: MSP430F5529.35 100.234,128.869 104.897,124.206 P2.5
MCU_P3.5: MSP430F5529.42 P2.7 | length 34.6
  Top Layer w0.2: MSP430F5529.42 96.198,131.151 v1(96.48,130.869)
  Bottom Layer w0.2: v1(96.48,130.869) 100.135,130.869 101.092,131.826 111.708,131.826 113.919,129.615 113.919,121.539 112.903,120.523 111.073,120.523 109.93,121.666 P2.7
MCU_P3.6: MSP430F5529.43 P2.1 | length 18.1
  Top Layer w0.2: MSP430F5529.43 95.698,131.835 95.123,131.26 95.123,130.175 v1(96.139,129.159)
  Bottom Layer w0.2: v1(96.139,129.159) 96.285,129.305 109.443,129.305 P2.1
MCU_P3.7: MSP430F5529.44 P2.3 | length 21.7
  Top Layer w0.2: v1(95.183,127.874) 94.234,128.823 94.234,130.937 95.148,131.851 95.148,133.144 MSP430F5529.44
  Bottom Layer w0.2: v1(95.183,127.874) 101.712,127.874 102.743,128.905 107.303,128.905 P2.3
MCU_P4.0: MSP430F5529.45 P2.10 | length 27.9
  Top Layer w0.2: v1(93.835,127.081) v1(93.835,127.081) 93.834,131.172 94.696,132.034 94.696,133.192 MSP430F5529.45
  Bottom Layer w0.2: v1(93.835,127.081) 94.13,127.081 100.942,120.269 110.762,120.269 111.905,119.126 P2.10
MCU_P4.1: MSP430F5529.46 P2.12 | length 31.5
  Top Layer w0.2: v1(92.075,126.619) 92.075,127.398 92.94,128.263 92.94,130.913 94.148,132.121 94.148,133.144 MSP430F5529.46
  Bottom Layer w0.2: v1(92.075,126.619) 93.542,125.152 95.493,125.152 102.916,117.729 110.859,117.729 P2.12
MCU_P4.2: MSP430F5529.47 P2.14 | length 35.3
  Top Layer w0.2: v1(90.57,126.144) 90.57,127.273 91.14,127.843 91.954,127.843 92.54,128.429 92.54,131.079 93.698,132.237 MSP430F5529.47
  Bottom Layer w0.2: v1(90.57,126.144) 90.703,126.144 92.095,124.752 95.327,124.752 104.89,115.189 110.859,115.189 P2.14
MCU_P4.3: MSP430F5529.48 P2.16 | length 37.2
  Top Layer w0.2: v1(91.567,128.778) 91.567,129.938 92.14,130.511 92.14,131.244 93.198,132.302 MSP430F5529.48
  Bottom Layer w0.2: v1(91.567,128.778) 89.635,126.846 89.635,125.756 90.183,125.209 91.072,125.209 91.929,124.352 95.162,124.352 106.865,112.649 110.859,112.649 P2.16
MCU_P4.7: MSP430F5529.54 P2.18 | length 38.6
  Top Layer w0.2: MSP430F5529.54 90.198,131.671 v1(90.805,131.064)
  Bottom Layer w0.2: v1(90.805,131.064) 88.665,128.924 88.665,126.161 90.017,124.809 90.837,124.809 91.694,123.952 94.996,123.952 108.712,110.236 110.732,110.236 P2.18
MCU_P5.2: MSP430F5529.69
MCU_P5.3: MSP430F5529.70
MCU_P6.0: MSP430F5529.77 P3.16 | length 29
  Top Layer w0.2: P3.16@83.947,107.188 83.947,106.807 82.55,105.41 78.359,105.41 77.144,106.625 77.144,116.133 84.38,123.369 MSP430F5529.77
MCU_P6.1: MSP430F5529.78 P3.18 | length 24.7
  Top Layer w0.2: P3.18 80.41,105.81 78.525,105.81 77.544,106.791 77.544,115.967 84.446,122.869 MSP430F5529.78
MCU_P6.2: MSP430F5529.79 P3.20 | length 19.5
  Top Layer w0.2: P3.20@78.867,106.807 78.867,107.188 77.944,108.111 77.944,115.802 84.511,122.369 MSP430F5529.79
MCU_P6.3: MSP430F5529.80 P3.19 | length 16
  Top Layer w0.2: P3.19 78.359,110.109 78.359,115.651 84.577,121.869 MSP430F5529.80
MCU_P6.4: MSP430F5529.1 P3.17 | length 13.3
  Top Layer w0.2: P3.17@81.407,109.728 P3.17@81.407,110.109 ; P3.17 87.198,115.138 MSP430F5529.1
MCU_P6.5: MSP430F5529.2 P3.15 | length 12.1
  Top Layer w0.2: P3.15 87.698,113.098 MSP430F5529.2
MCU_P6.6: MSP430F5529.3 P3.13 | length 11.2
  Top Layer w0.2: P3.13 88.198,111.058 MSP430F5529.3
MCU_P6.7: MSP430F5529.4 P3.11 | length 10.8
  Top Layer w0.2: MSP430F5529.4 88.698,109.93 P3.11
MCU_P6.8: MSP430F5529.5 P3.9 | length 11.3
  Top Layer w0.2: MSP430F5529.5 89.198,112.478 91.567,110.109 P3.9@91.567,109.728
MCU_P7.4: MSP430F5529.57 P2.20 | length 40.8
  Top Layer w0.2: MSP430F5529.57 88.698,131.647 v1(89.281,131.064)
  Bottom Layer w0.2: v1(89.281,131.064) 89.281,130.538 88.265,129.522 88.265,125.995 89.851,124.409 90.672,124.409 91.528,123.552 94.83,123.552 107.061,111.321 107.061,109.474 108.839,107.696 110.49,107.696 111.76,106.426 P2.20
NetC51_2: C51.2 CC1101.5 | length 4.6
  Top Layer w0.2: CC1101.5 105.192,90.807 106.299,91.914 106.739,91.914 C51.2
NetC81_2: C81.2 CC1101.8 Y3.1 | length 17.5
  Top Layer w0.2: CC1101.8 101.182,92.927 109.694,101.439 109,101.439 107.179,103.26 Y3.1
NetC103_2: C103.2 MSP430F5529.12 Y1.1 | length 6.4
  Top Layer w0.2: C103.2 91.329,114.672 Y1.1 92.698,117.999 MSP430F5529.12
NetC104_2: C104.2 MSP430F5529.13 Y1.2 | length 6.1
  Top Layer w0.2: MSP430F5529.13 93.198,117.861 Y1.2 94.429,114.529 C104.2
NetC108_2: C108.2 MSP430F5529.20 | length 2.8
  Top Layer w0.2: MSP430F5529.20 96.698,118.093 C108.2@97.282,117.509
NetC121_1: C121.1 CC1101.12 L121.2 | length 9.4
  Top Layer w0.2: C121.1 89.984,90.009 L121.2 92.49,90.297 99.227,90.297 CC1101.12
NetC121_2: C121.2 L122.2 L131.2 | length 4.1
  Top Layer w0.2: L131.2 87.85,87.952 L122.2 87.791,89.984 C121.2
NetC122_2: C122.2 L122.1 L123.2 | length 3.9
  Top Layer w0.2: L123.2 83.786,88.011 C122.2 85.784,88.045 L122.1@85.818,88.011
NetC123_2: C123.2 C125.1 L123.1 | length 3.7
  Top Layer w0.2: C125.1 79.722,89.916 C123.2 79.756,88.104 L123.1
NetC124_2: C124.2 L121.1 | length 1.5
  Top Layer w0.2: L121.1 C124.2
NetC131_1: C131.1 CC1101.13 L131.1 | length 10.9
  Top Layer w0.2: L131.1 90.043,85.886 C131.1 93.252,85.886 97.173,89.807 CC1101.13
NetC302_2: C302.2 CC1101.10 Y3.3 | length 19.9
  Top Layer w0.2: v1@97.917,93.651 99.643,93.651 100.182,93.112 CC1101.10 ; C302.2 102.61,100.844 ; v1(104.394,97.917) 104.394,99.06 102.61,100.844 ; Y3.3 103.626,101.86 102.61,100.844
  Bottom Layer w0.2: v1(97.663,93.651) 101.854,97.842 104.319,97.842 v1(104.394,97.917)
NetCC1101_17: CC1101.17 R171.2 | length 7.3
  Top Layer w0.2: CC1101.17 100.682,84.611 102.489,82.804 R171.2
NetCrout_bat_2: Crout_bat.2 Jumper_Alimentacion.1 Reg_bat.5 | length 7.7
  Bottom Layer w0.381: Jumper_Alimentacion.1 107.061,145.113 Crout_bat.2 107.123,148.016 Reg_bat.5
NetHM10_23: HM10.23 R2.1 SW1.1 | length 20.7
  Top Layer w0.2: HM10.23 92.825,140.093 v1(92.837,140.081) ; R2.1 99.06,139.954 v1(98.933,140.081) 101.678,140.081 SW1.1@101.727,140.13
  Bottom Layer w0.2: v1(92.837,140.081) v1(98.933,140.081)
NetHM10_24: HM10.24 R1.2 | length 5.5
  Top Layer w0.2: v1(89.737,147.61) 91.325,149.198 HM10.24
  Bottom Layer w0.2: R1.2 89.737,145.32 v1(89.737,147.61)
NetLED_HM10_1: LED_HM10.1 R1.1 | length 10
  Top Layer w0.2: LED_HM10.1 v1(99.441,146.939)
  Bottom Layer w0.2: R1.1 97.79,145.288 v1(99.441,146.939)
NetLEDch_2: LEDch.2 RLEDch.1 | length 17.5
  Top Layer w0.2: v1(116.459,127.889) 116.471,127.901 LEDch.2
  Bottom Layer w0.2: RLEDch.1 106.045,135.127 108.648,132.524 111.823,132.524 v1(116.459,127.889)
NetMCP73832_1: MCP73832.1 RLEDch.2 | length 3.4
  Bottom Layer w0.2: RLEDch.2 108.203,139.32 108.651,138.872 MCP73832.1
NetMCP73832_5: MCP73832.5 Rprog.1 | length 9.8
  Bottom Layer w0.381: MCP73832.5 108.651,134.935 109.855,133.731 112.395,133.731 115.189,130.937 Rprog.1
NetR3_2: R3.2 USB.6@120.577,130.7 USB.6@120.577,131.17 | length 3.5
  Bottom Layer w0.2: USB.6@120.577,130.7 121.74,131.863 R3.2@121.74,133.677
SBWTCK: MSP430F5529.71 SBW.1 | length 6.5
  Top Layer w0.2: SBW.1@80.772,130.048 84.451,126.369 MSP430F5529.71
  Top Layer w0.5: SBW.1 SBW.1@80.772,130.048
SBWTDIO: C111.2 MSP430F5529.76 R102.1 SBW.2 SRST.2 | length 13.5
  Top Layer w0.2: SRST.2 76.962,126.805 C111.2 78.418,126.932 78.994,127.508 SBW.2 81.364,127.508 R102.1 83.947,124.925 83.947,124.434 84.462,123.919 85.323,123.919 MSP430F5529.76
SCLK: CC1101.1 MSP430F5529.39 P2.6 | length 81.2
  Top Layer w0.2: MSP430F5529.39 101.287,130.869 v1(101.6,130.556) ; CC1101.1 103.725,88.807 104.267,88.265 104.267,86.233 105.772,84.728 108.154,84.728 121.755,98.329 121.755,119.222 116.771,124.206 P2.6
  Bottom Layer w0.2: v1(101.6,130.556) 112.268,130.556 113.519,129.305 113.519,125.723 P2.6
SI: CC1101.20 MSP430F5529.37 P2.4 | length 78.5
  Top Layer w0.2: MSP430F5529.37 100.365,129.869 104.157,126.077 105.67,126.077 106.271,125.476 110.732,125.476 P2.4 114.796,126.746 122.155,119.387 122.155,98.164 108.319,84.328 103.886,84.328 102.182,86.032 CC1101.20
SO: CC1101.2 MSP430F5529.38 P2.8 | length 76.6
  Top Layer w0.2: MSP430F5529.38 100.431,130.369 103.038,127.762 v1(104.013,127.762) ; CC1101.2 103.262,89.222 104.199,89.222 104.667,88.754 104.667,86.399 105.938,85.128 107.988,85.128 121.355,98.495 121.355,119.056 118.745,121.666 P2.8
  Bottom Layer w0.2: v1(104.013,127.762) 104.013,124.841 106.045,122.809 110.859,122.809 P2.8
UART_RX: HM10.1 MSP430F5529.41 UART.1 | length 29.9
  Top Layer w0.2: HM10.1 76.325,135.638 78.066,133.897 UART.1 ; MSP430F5529.41 96.698,134.469 97.23,135.001 98.044,135.001 98.432,134.613 v1(98.432,133.261)
  Bottom Layer w0.2: UART.1@81.33,133.935 83.312,131.953 85.598,131.953 86.233,132.588 97.759,132.588 v1(98.432,133.261)
UART_TX: HM10.2 MSP430F5529.40 UART.2 | length 27.6
  Top Layer w0.2: HM10.2 77.824,135.663 78.359,135.128 82.55,135.128 83.781,133.897 UART.2 ; MSP430F5529.40 99.634,131.369 100.203,131.938 v1(100.203,132.917)
  Bottom Layer w0.2: UART.2 84.175,134.239 98.881,134.239 v1(100.203,132.917)
V_IN: Crin_bat.2 Reg_bat.1 Reg_bat.3 SW_Cargador-Circuito.3 | length 13.9
  Bottom Layer w0.2: Reg_bat.1 115.636,148.016 118.491,145.161 ; Reg_bat.3@114.062,146.304 Reg_bat.3 114.829,145.161 118.491,145.161 ; SW_Cargador-Circuito.3 118.872,143.764 118.872,144.78 118.491,145.161
VBATERIA: conBat.2 SW_Cargador-Circuito.2 | length 5.6
  Top Layer w0.2: SW_Cargador-Circuito.2 118.09,140.442 conBat.2
VBATERIA_CARGA: Cch2.2 MCP73832.3 SW_Cargador-Circuito.1 | length 10.9
  Bottom Layer w0.2: MCP73832.3 110.617,138.324 Cch2.2 115.19,140.588 SW_Cargador-Circuito.1
VCC: C2.2 C105.1 C106.1 C107.1 C109.2 HM10.12 Jumper_Alimentacion.2 L1.2 MSP430F5529.11 MSP430F5529.18 MSP430F5529.50 P3.12 R2.2 R102.2 SBW.3 | length 165
  Top Layer w0.2: SBW.3 81.364,123.995 R102.2 ; v1(87.757,130.683) 88.773,129.667 90.73,129.667 91.74,130.677 91.74,131.41 92.198,131.868 MSP430F5529.50 ; v1(87.804,124.968) 87.804,123.346 89.483,121.666 91.437,121.666 92.148,120.955 92.148,120.827 92.198,120.777 MSP430F5529.11 92.148,119.994 92.148,119.133 91.884,118.869 91.183,118.869 v1(90.551,118.237) ; MSP430F5529.50@92.202,133.198 MSP430F5529.50 ; 92.825,135.775 93.599,135.001 96.139,135.001 97.325,136.187 R2.2 99.069,136.178 C109.2 ; HM10.12 92.825,135.751 92.198,135.124 MSP430F5529.50 ; 95.648,119.133 95.377,118.862 v1(95.377,118.11) 95.885,117.602 95.885,114.343 96.529,113.699 C105.1@97.409,113.699
  Top Layer w0.5: v1(87.757,130.683) 87.757,125.015 v1(87.804,124.968) ; C107.1@89.054,101.319 v1(92.456,97.917) ; C107.1@89.154,100.965 P3.12@89.154,106.807 ; v1(111.125,85.09) 112.048,85.09 L1.2
  Bottom Layer w0.2: v1(90.551,118.237) 90.678,118.11 v1(95.377,118.11)
  Bottom Layer w0.5: SBW.3 81.28,125.857 83.058,125.857 84.328,124.587 ; v1(87.757,130.683) 87.503,130.937 82.804,130.937 81.915,131.826 80.01,131.826 78.867,132.969 78.867,137.611 83.75,142.494 106.436,142.494 Jumper_Alimentacion.2 ; v1(87.804,124.968) 84.709,124.968 84.328,124.587 ; P3.12@89.027,107.188 87.884,108.331 87.884,111.76 84.328,115.316 84.328,124.587 ; v1(92.456,97.917) 92.456,93.853 100.965,85.344 110.871,85.344 v1(111.125,85.09)
VDD_TXRX: C1.2 C301.1 C303.2 C304.2 C305.2 C306.2 C307.2 CC1101.4 CC1101.9 CC1101.11 CC1101.14 CC1101.15 CC1101.18 L1.1 | length 124.5
  Top Layer w0.2: C306.2 96.647,87.884 98.07,89.307 CC1101.14 ; CC1101.15 98.205,88.807 97.282,87.884 97.282,84.328 99.568,82.042 C301.1 ; CC1101.11 97.407,90.807 96.3,91.914 C307.2 98.177,95.129 98.651,95.603 C304.2 CC1101.9@100.711,91.811 ; CC1101.18 101.182,85 103.759,82.423 104.18,82.423 C305.2 105.45,81.153 v1(109.093,81.153) v1@109.186,81.06 ; CC1101.4 106.89,90.307 C303.2 ; v1@107.154,87.991 v1(107.355,87.79) v1@107.355,88.098 ; C1.2 C1.2@111.574,80.992
  Top Layer w0.254: C306.2@96.653,81.187 C301.1
  Top Layer w0.5: v1(93.218,81.153) C306.2@96.607,81.153 ; v1(94.488,99.949) 96.3,98.137 C307.2 ; v1@107.154,87.991 C303.2 ; v1@109.186,81.06 C1.2 ; C1.2@111.574,80.992 L1.1 114.113,80.925 v1@116.493,83.304
  Bottom Layer w0.2: v1@109.093,81.026 v1(109.093,81.153)
  Bottom Layer w0.5: v1(94.488,99.949) 92.456,99.949 90.678,98.171 90.678,83.693 v1(93.218,81.153) 94.361,80.01 108.077,80.01 v1@109.093,81.026 ; v1(107.355,87.79) 112.489,87.79 v1(116.459,83.82)
VUSB: C4.2 Cch1.2 LEDch.1 MCP73832.4 USB.5 | length 19.1
  Top Layer w0.381: v1(117.348,133.096) 117.971,132.473 LEDch.1 118.001,129.57 USB.5
  Bottom Layer w0.2: Cch1.2@119.336,135.681 Cch1.2
  Bottom Layer w0.381: MCP73832.4 110.757,135.602 C4.2 114.011,135.51 Cch1.2@119.055,135.51 ; v1(117.348,133.096) 117.348,133.803 Cch1.2@119.055,135.51 ; Cch1.2 Cch1.2@119.055,135.51
pads on no net: HM10.3 HM10.4 HM10.5 HM10.6 HM10.7 HM10.8 HM10.9 HM10.10 HM10.11 HM10.15 HM10.16 HM10.17 HM10.18 HM10.19 HM10.20 HM10.25 HM10.26 HM10.27 HM10.28 HM10.29 HM10.30 HM10.31 HM10.32 HM10.33 HM10.34 MSP430F5529.6 MSP430F5529.7 MSP430F5529.8 MSP430F5529.9 MSP430F5529.10 MSP430F5529.15 MSP430F5529.16 MSP430F5529.17 MSP430F5529.51 MSP430F5529.52 MSP430F5529.53 MSP430F5529.55 MSP430F5529.56 MSP430F5529.58 MSP430F5529.59 MSP430F5529.60 MSP430F5529.62 MSP430F5529.64 MSP430F5529.66 MSP430F5529.67 MSP430F5529.72 MSP430F5529.73 MSP430F5529.74 MSP430F5529.75 P3.14 Reg_bat.4 U6. USB.2 USB.3 USB.4 USB.6@120.577,125.37 USB.6@120.577,125.85 USB.6@121.952,124.57 USB.6@121.952,131.97 USB.6@123.227,125.47 USB.6@123.227,131.07 USB.6@123.607,125.47 USB.6@123.607,131.08 Y3.2 Y3.4

## Polygon pours and split planes (outlines as drawn)
GND on Bottom Layer "Bottom Layer-GND" (solid, pour order 17): 117.602,152.146 125.349,152.146 125.349,146.558 125.349,125.73 125.349,84.074 125.349,77.597 132.207,77.47 132.08,77.597 75.184,77.597 74.93,77.47 74.93,152.146 112.975,152.146
GND on Top Layer "Top Layer-GND" (solid, pour order 18): 117.602,152.146 125.349,152.146 125.349,146.558 125.349,125.73 125.349,84.074 125.349,77.597 130.643,77.499 128.651,77.597 75.185,77.597 74.93,77.47 74.93,152.146 112.975,152.146

## Keep-outs
Keep-Out Layer:
  lines w0.254: 45.593,77.47 45.593,152.273 125.476,152.273 125.476,77.47 45.593,77.47

## Silkscreen, mask and mechanical layers (free items; w line width, h text height)
Top Overlay:
  drawing of 61 lines, arcs and shapes, not listed
  text "BLE PGN" at 48.006,128.905 h3.5
Drill Drawing:
  text "Drill Drawing." at 28.956,91.44 h0.7

## Dimensions
45.593,77.47 to 45.593,152.273 on Mechanical 1

## Text inside footprints (layer, text, board x,y; h text height)
conBat: Top Overlay "2" at 122.047,140.081 h0.7 r90; Top Overlay "1" at 122.047,137.668 h0.7 r90
HM10: Top Overlay "HM-10" at 85.672,140.507 h1.52 r90
Jumper_Alimentacion: Top Overlay "2" at 108.995,144.36 h0.7 r90; Top Overlay "1" at 108.995,141.947 h0.7 r90
P2: Top Overlay "2" at 111.633,131.064 h0.7; Top Overlay "1" at 109.22,131.064 h0.7; Top Overlay "19" at 106.807,106.045 h0.7; Top Overlay "20" at 112.014,104.013 h0.7
P3: Top Overlay "2" at 103.886,106.553 h0.7; Top Overlay "1" at 104.013,109.22 h0.7; Top Overlay "19" at 76.2,109.347 h0.7; Top Overlay "20" at 76.205,106.455 h0.7
SW_Cargador-Circuito: Top Overlay "3" at 120.269,142.367 h0.7 r90; Top Overlay "2" at 120.269,140.081 h0.7 r90; Top Overlay "1" at 120.269,137.668 h0.7 r90
U6: Top Overlay "433" at 58.37,122.105 h0.7 r90